# Altium PCB WUT-YJ-4-3-1.PcbDoc (part 7 of 11)
Units mm, origin at the board's own origin, x right, y up, seen from the top; angles counter-clockwise.
Board outline 85 x 56 mm, 4 copper layers (Top Layer, GND_Plane, 3V3_Plane, Bottom Layer); 182 components, 321 nets, 1106 pads, 360 vias.
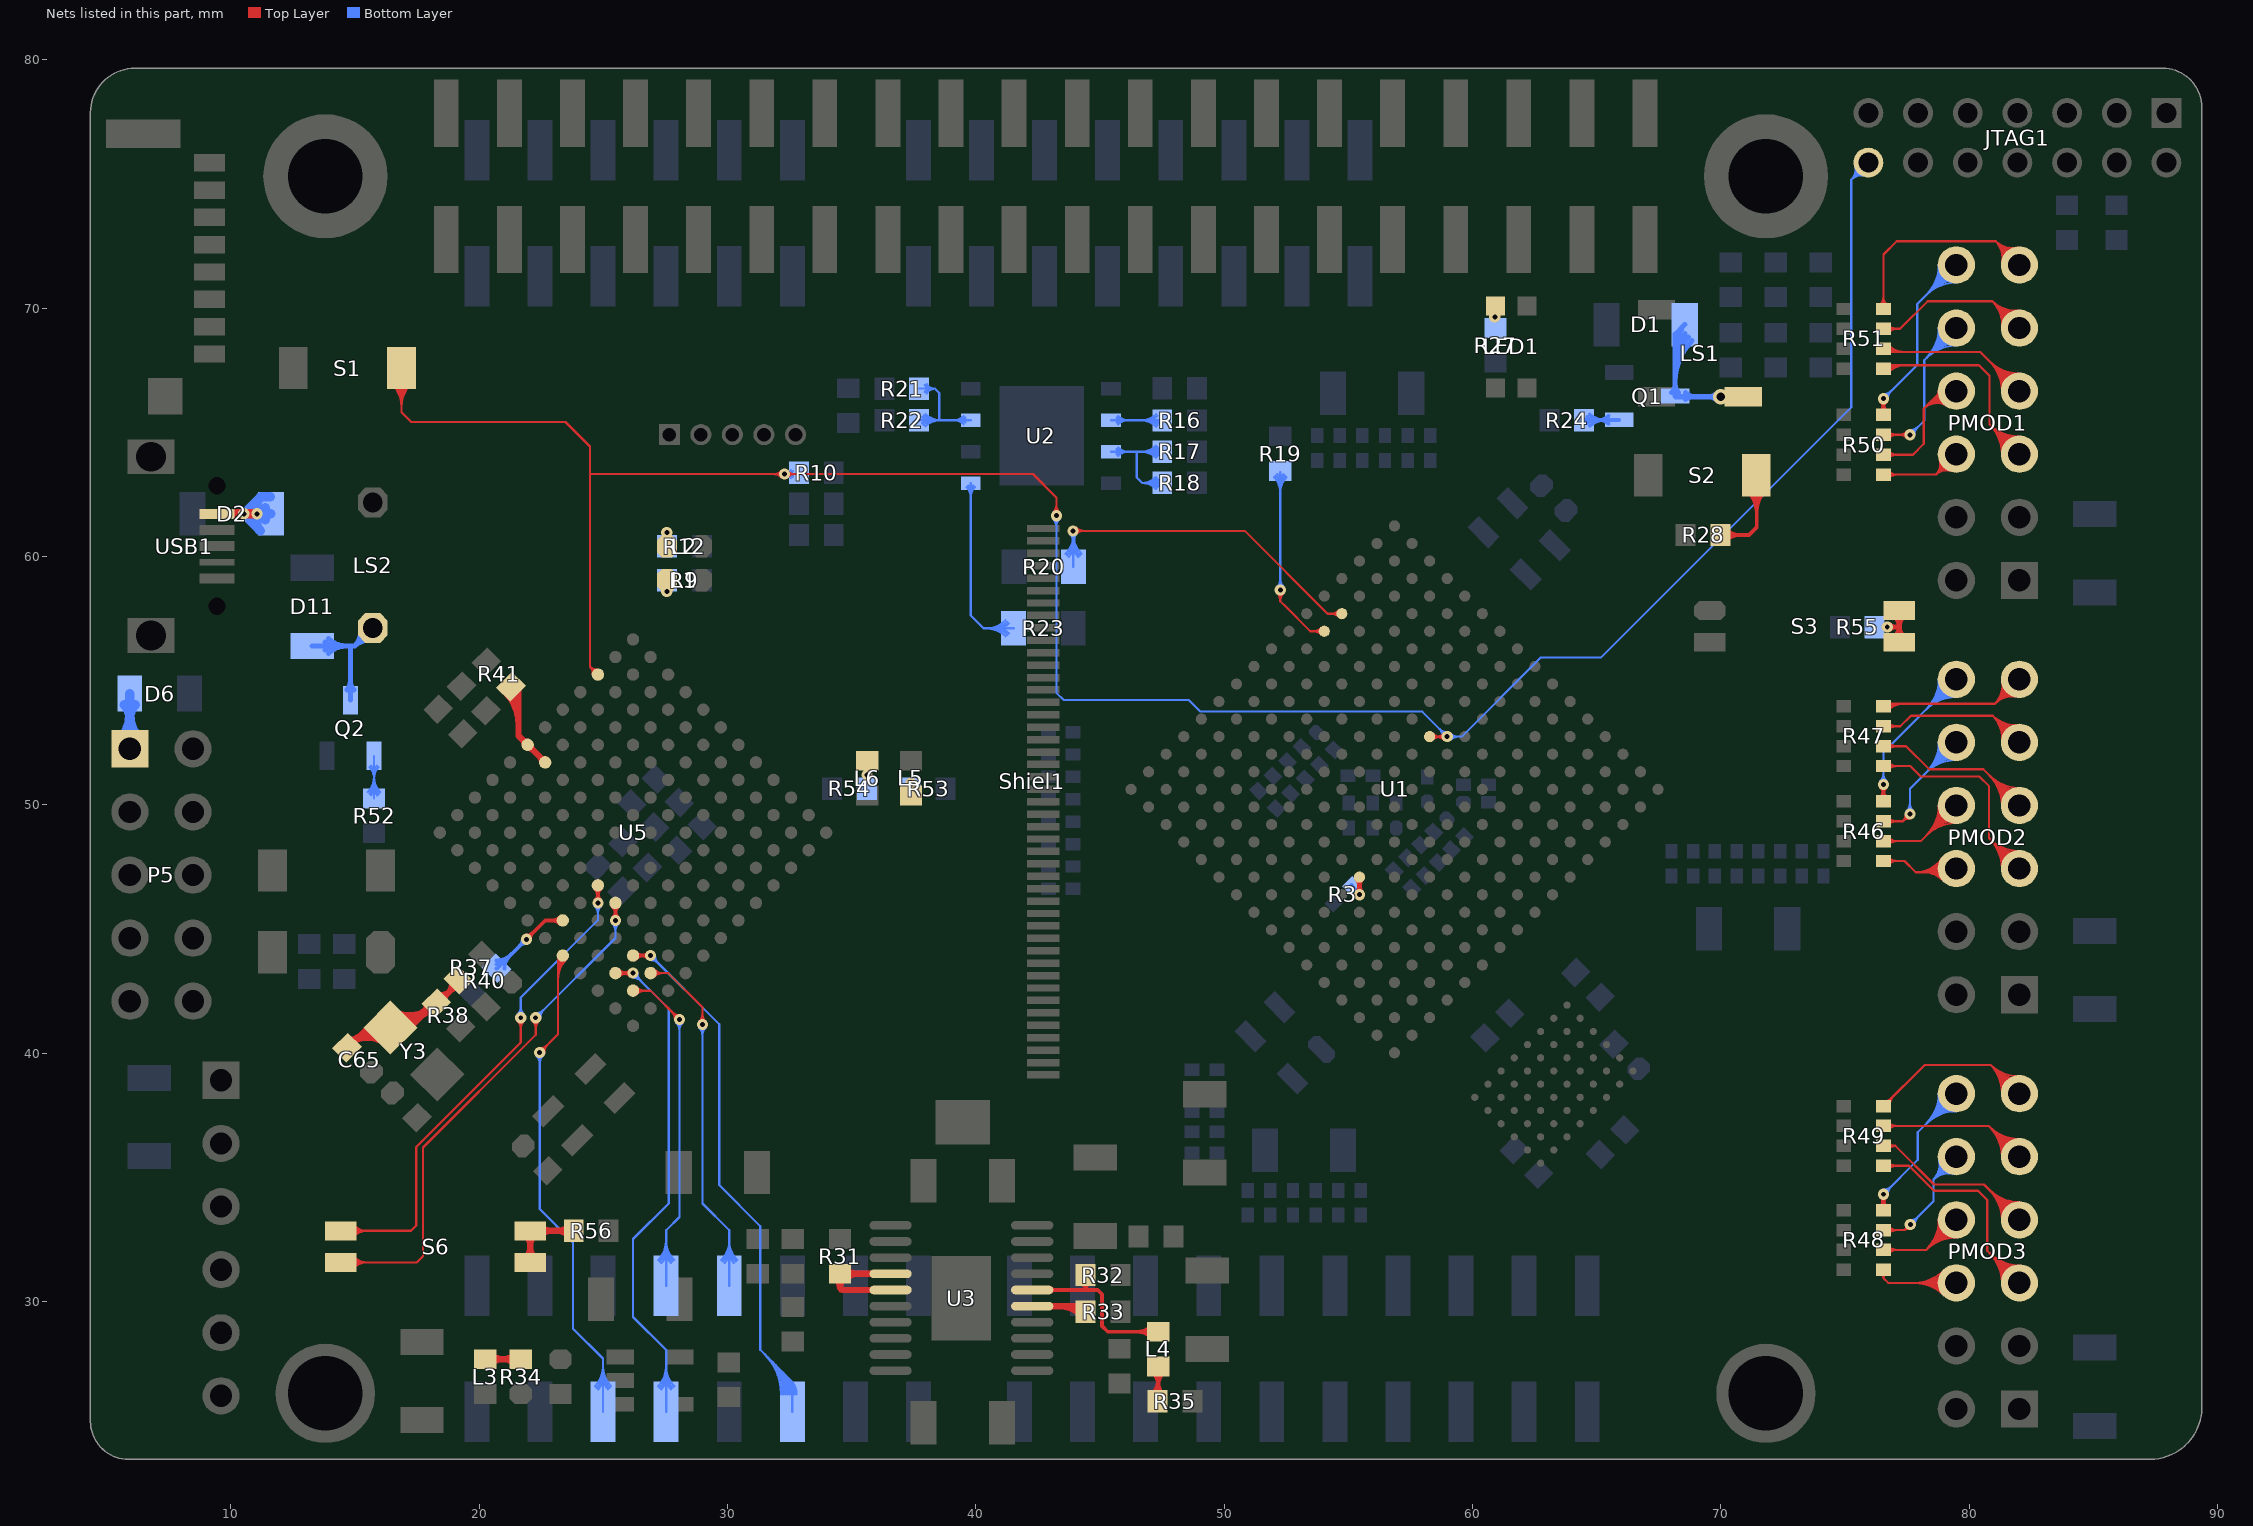
[diagram p9: the nets of this part, all layers, seen from the top]

## Via types
v1: diameter 0.45, hole 0.2, Top Layer to Bottom Layer, tented both sides, 280 vias
v2: diameter 0.61, hole 0.33, Top Layer to Bottom Layer, tented both sides, 40 vias
v3: diameter 0.403, hole 0.2, Top Layer to Bottom Layer, tented both sides, 15 vias
v4: diameter 0.5, hole 0.2, Top Layer to Bottom Layer, tented both sides, 12 vias
v5: diameter 0.864, hole 0.508, Top Layer to Bottom Layer, tented both sides, 11 vias
v6: diameter 0.864, hole 0.356, Top Layer to Bottom Layer, tented both sides, 1 vias
v7: diameter 0.864, hole 0.381, Top Layer to Bottom Layer, tented both sides, 1 vias

## Nets (pads, with @x,y where several pads share a name; then routed paths per layer and width w, separated by ;. In a path a pad name is that pad's centre, name@x,y a point inside that pad or via, vN(x,y) a via of type N, cw(c..) or ccw(c..) an arc to the next point about the centre after c; other vN are vias at no path point) (continued)
NetC65_2: C65.2 R37.1 R38.2 Y3.2 | length 35.1
  Top Layer w0.152: C65.2@14.717,40.44 ccw(c14.717,40.854) 15.009,40.561 ccw(c15.302,40.269) C65.2@14.888,40.269 ; C65.2@14.717,40.592 ccw(c14.717,41.374) 15.27,40.821 ccw(c15.822,40.269) C65.2@15.041,40.269 ; C65.2@14.824,40.376 cw(c15.616,39.584) Y3.2@16.162,40.562 ; C65.2@14.967,40.518 cw(c15.718,39.767) Y3.2@16.236,40.695 ; 15.109,40.661 cw(c15.82,39.95) Y3.2@16.311,40.828 ; 15.252,40.803 cw(c15.922,40.133) Y3.2@16.385,40.961 ; 15.394,40.946 cw(c16.025,40.316) Y3.2@16.459,41.094 ; Y3.2@15.537,41.088 cw(c16.127,40.498) Y3.2@16.534,41.227 ; Y3.2@16.088,40.429 ccw(c15.514,39.401) C65.2@14.682,40.233 15.486,41.038 Y3.2@16.43,41.038 17.29,41.038 R38.2@18.276,42.024 ; Y3.2@16.353,40.836 ccw(c16.668,41.647) Y3.2@17.283,41.032 ; Y3.2@16.409,40.978 ccw(c16.76,41.886) 17.449,41.197 ; Y3.2@16.464,41.12 ccw(c16.853,42.124) 17.614,41.363 ; Y3.2@16.519,41.262 ccw(c16.945,42.362) 17.78,41.528 ; Y3.2@16.574,41.404 ccw(c17.038,42.601) 17.945,41.693 ; Y3.2@16.629,41.546 ccw(c17.13,42.839) R38.2@18.11,41.859 ; Y3.2@16.684,41.688 ccw(c17.222,43.077) R38.2@18.276,42.024 ; 17.512,41.5 ccw(c17.048,42.274) R38.2@17.925,42.064 ; 17.685,41.604 cw(c18.009,41.064) R38.2@18.162,41.675 ; 17.823,41.686 ccw(c17.541,42.156) R38.2@18.074,42.028 ; R38.2@17.916,41.989 cw(c17.135,41.989) 17.688,41.436 cw(c18.24,40.883) R38.2@18.24,41.665 ; R38.2@17.925,42.062 cw(c17.287,42.209) 17.614,41.642 cw(c17.917,41.119) R38.2@18.127,41.685 ; R38.2@18.069,41.989 cw(c17.655,41.989) 17.948,41.696 cw(c18.24,41.403) R38.2@18.24,41.817 ; R38.2@18.304,42.231 ccw(c18.282,42.768) 18.748,42.499 ; R38.2@18.311,42.231 ccw(c18.311,42.95) 18.819,42.441 ; R38.2@18.311,42.383 ccw(c18.311,43.47) R37.1@19.079,42.701 ; R38.2@18.571,42.193 ccw(c17.836,42.929) R37.1@18.876,42.929 ; R38.2@18.624,42.143 cw(c18.856,42.205) 18.648,42.326 ; R38.2@18.635,42.059 cw(c19.111,42.059) 18.774,42.396 ; 18.83,42.452 cw(c19.2,42.082) R37.1@19.2,42.605 ; 18.832,42.454 ccw(c18.356,42.929) R37.1@19.029,42.929 ; R37.1@19.254,42.876 18.402,42.024 R38.2@18.276,42.024
NetD1_1: D1.1 LS1.2 Q1.1 | length 14.6
  Top Layer w0.203: v2@69.99,66.434 v2(69.992,66.436) ; v2@70.136,66.293 cw(c70.483,65.946) 70.483,66.436 cw(c70.483,66.927) v2@70.136,66.58 ; LS1.2@70.304,66.27 ccw(c69.992,66.062) v2(69.992,66.436) ; LS1.2@70.304,66.602 cw(c69.992,66.811) v2(69.992,66.436) ; LS1.2@70.901,66.436 v2(69.992,66.436)
  Bottom Layer w0.203: Q1.1@68.015,66.599 ccw(c67.677,66.938) 68.156,66.938 ccw(c68.635,66.938) Q1.1@68.296,66.599 ; 68.156,67.037 cw(c70.497,67.037) D1.1@68.841,68.693 ; 68.156,67.527 cw(c70.007,67.527) D1.1@68.698,68.836 ; 68.156,68.018 cw(c69.516,68.018) D1.1@68.554,68.98 ; D1.1@68.156,68.508 cw(c69.026,68.508) D1.1@68.41,69.124 ; D1.1@68.542,69.342 68.156,68.956 Q1.1@68.156,66.459 68.178,66.436 v2(69.992,66.436) ; Q1.1@68.571,66.319 cw(c68.855,66.035) 68.855,66.436 ; Q1.1@68.571,66.599 ccw(c68.965,66.993) 68.965,66.436 ; v2@69.849,66.293 ccw(c69.502,65.946) 69.502,66.436 ccw(c69.502,66.927) v2@69.849,66.58
NetD2_1: D2.1 USB1.1 | length 9
  Top Layer w0.381: USB1.1@9.449,61.722 v1(10.528,61.722) v1(11.062,61.722)
  Bottom Layer w0.381: v1@11.092,61.706 ccw(c11.597,61.445) 11.195,61.043 10.528,61.709 v1(10.528,61.722) ; v1@11.093,61.736 cw(c11.637,61.985) D2.1@11.214,62.408 ; D2.1@11.384,61.485 ccw(c10.813,60.914) 10.813,61.722 ccw(c10.813,62.53) D2.1@11.384,61.959 ; D2.1@11.595,62.408 D2.1@11.214,62.408 ; D2.1@11.621,61.722 v1(11.062,61.722) ; v1(10.528,61.722) v1(11.062,61.722) ; v1(10.528,61.722) D2.1@11.214,62.408 ; v1(11.062,61.722) cw(c11.062,61.422) 11.326,61.564 ccw(c11.062,61.422) v1(11.062,61.722) ; v1(11.062,61.722) ccw(c11.062,62.022) 11.326,61.88 cw(c11.062,62.022) v1(11.062,61.722)
NetD6_2: D6.2 P5.1 | length 5.5
  Bottom Layer w0.381: P5.1@5.548,52.656 ccw(c4.608,53.596) 5.937,53.596 ; D6.2@5.719,54.039 cw(c5.19,53.511) 5.937,53.511 cw(c6.685,53.511) D6.2@6.156,54.039 ; 5.937,53.626 ccw(c7.309,53.626) P5.1@6.339,52.656 ; D6.2@5.937,54.483 5.937,52.267 P5.1@5.944,52.261
NetD11_1: D11.1 LS2.2 Q2.1 | length 10.4
  Bottom Layer w0.203: D11.1@13.284,56.4 14.783,56.4 ; D11.1@13.79,56.245 cw(c14.166,55.869) 14.166,56.4 cw(c14.166,56.932) D11.1@13.79,56.556 ; D11.1@13.934,56.101 cw(c14.656,55.378) 14.656,56.4 cw(c14.656,57.423) D11.1@13.934,56.7 ; Q2.1@14.681,54.639 ccw(c14.342,54.978) 14.821,54.978 ccw(c15.3,54.978) Q2.1@14.961,54.639 ; Q2.1@14.821,54.224 14.821,56.362 14.783,56.4 ; LS2.2@15.228,57.065 cw(c14.431,56.968) 14.999,56.401 ; LS2.2@15.43,57.089 cw(c14.958,57.032) 15.294,56.696 cw(c15.63,56.36) LS2.2@15.687,56.832 ; LS2.2@15.663,56.63 ccw(c15.566,55.833) 14.999,56.401 ; LS2.2@15.723,57.125 14.998,56.4 ; 14.783,56.4 14.998,56.4
NetL1_1: L1.1 R9.1
  other v1: 27.559,58.598
NetL2_1: L2.1 R12.1
  other v1: 27.559,60.973
NetL3_2: L3.2 R34.2 | length 3.5
  Top Layer w0.254: L3.2@20.244,27.688 R34.2@21.679,27.688 ; L3.2@20.487,27.494 cw(c20.953,27.028) 20.953,27.688 cw(c20.953,28.347) L3.2@20.487,27.881 ; R34.2@21.436,27.494 ccw(c20.97,27.028) 20.97,27.688 ccw(c20.97,28.347) R34.2@21.436,27.881
NetL4_2: L4.2 R35.2 | length 4.9
  Top Layer w0.152: R35.2@47.09,26.276 ccw(c46.472,26.894) 47.346,26.894 ; L4.2@47.117,27.163 cw(c46.564,26.611) 47.346,26.611 cw(c48.127,26.611) L4.2@47.575,27.163 ; R35.2@47.198,26.168 ccw(c46.84,26.526) 47.346,26.526 ; L4.2@47.224,27.271 cw(c46.932,26.979) 47.346,26.979 cw(c47.759,26.979) L4.2@47.467,27.271 ; R35.2@47.319,25.997 47.346,26.024 L4.2@47.346,27.392 ; 47.346,26.764 ccw(c48.035,26.764) R35.2@47.548,26.276
NetL5_2: L5.2 R53.2
  other v1: 37.389,50.889
NetL6_2: L6.2 R54.2
  other v1: 35.623,51.206
NetLED1_2: LED1.2 R27.1
  other v1: 60.896,69.647
NetPMOD1_5: PMOD1.5 R51.1 | length 19.9
  Top Layer w0.089: R51.1@76.543,67.57 76.676,67.704 80.391,67.704 80.81,67.285 80.81,65.329 PMOD1.5@82.017,64.122 ; R51.1@76.612,67.551 cw(c76.981,67.182) 76.981,67.704 ; R51.1@76.675,67.488 cw(c77.196,66.967) 77.196,67.704 ; R51.1@76.738,67.425 cw(c77.411,66.753) 77.411,67.704 ; PMOD1.5@81.311,64.122 ccw(c79.608,64.122) 80.812,65.327 ccw(c82.017,66.531) PMOD1.5@82.017,64.828 ; PMOD1.5@81.4,64.122 ccw(c79.911,64.122) 80.964,65.175 ccw(c82.017,66.228) PMOD1.5@82.017,64.739 ; PMOD1.5@81.489,64.122 ccw(c80.215,64.122) 81.116,65.023 ccw(c82.017,65.924) PMOD1.5@82.017,64.65 ; PMOD1.5@81.578,64.122 ccw(c80.518,64.122) 81.267,64.871 ccw(c82.017,65.621) PMOD1.5@82.017,64.561 ; PMOD1.5@81.667,64.122 ccw(c80.822,64.122) 81.419,64.72 ccw(c82.017,65.317) PMOD1.5@82.017,64.472
NetPMOD1_6: PMOD1.6 R50.1 | length 7.9
  Top Layer w0.089: R50.1@76.543,63.303 78.658,63.303 ; R50.1@76.675,63.221 cw(c76.874,63.022) 76.874,63.303 cw(c76.874,63.585) R50.1@76.675,63.386 ; R50.1@76.738,63.158 cw(c77.089,62.807) 77.089,63.303 cw(c77.089,63.8) R50.1@76.738,63.449 ; PMOD1.6@78.804,63.908 cw(c78.235,63.726) 78.658,63.303 ; PMOD1.6@78.889,63.935 cw(c78.391,63.776) 78.761,63.407 cw(c79.13,63.037) PMOD1.6@79.289,63.535 ; PMOD1.6@78.974,63.962 cw(c78.548,63.826) 78.864,63.51 cw(c79.18,63.194) PMOD1.6@79.316,63.62 ; PMOD1.6@79.262,63.45 ccw(c79.08,62.881) 78.658,63.303 ; PMOD1.6@79.477,64.122 78.658,63.303
NetPMOD1_7: PMOD1.7 R51.3 | length 17.9
  Top Layer w0.089: R51.3@76.543,68.371 76.676,68.237 80.442,68.237 PMOD1.7@82.017,66.662 ; R51.3@76.612,68.39 ccw(c76.982,68.76) 76.982,68.237 ; R51.3@76.675,68.453 ccw(c77.196,68.974) 77.196,68.237 ; R51.3@76.738,68.516 ccw(c77.411,69.189) 77.411,68.237 ; PMOD1.7@81.311,66.662 ccw(c79.608,66.662) 80.812,67.867 ccw(c82.017,69.071) PMOD1.7@82.017,67.368 ; PMOD1.7@81.4,66.662 ccw(c79.911,66.662) 80.964,67.715 ccw(c82.017,68.768) PMOD1.7@82.017,67.279 ; PMOD1.7@81.489,66.662 ccw(c80.215,66.662) 81.116,67.563 ccw(c82.017,68.464) PMOD1.7@82.017,67.19 ; PMOD1.7@81.578,66.662 ccw(c80.518,66.662) 81.267,67.411 ccw(c82.017,68.161) PMOD1.7@82.017,67.101 ; PMOD1.7@81.667,66.662 ccw(c80.822,66.662) 81.419,67.26 ccw(c82.017,67.857) PMOD1.7@82.017,67.012
NetPMOD1_8: PMOD1.8 R50.3 | length 13.4
  Top Layer w0.089: R50.3@76.543,64.103 77.73,64.103 78.168,64.541 78.168,65.964 ; R50.3@76.675,64.021 cw(c76.874,63.822) 76.874,64.103 cw(c76.874,64.385) R50.3@76.675,64.186 ; R50.3@76.738,63.958 cw(c77.089,63.607) 77.089,64.103 cw(c77.089,64.6) R50.3@76.738,64.249 ; 78.247,66.042 cw(c78.759,65.531) PMOD1.8@79.146,66.142 ; 78.325,66.121 cw(c78.82,65.627) PMOD1.8@79.194,66.217 ; 78.404,66.199 cw(c78.88,65.723) PMOD1.8@79.241,66.292 ; 78.482,66.278 cw(c78.941,65.819) PMOD1.8@79.289,66.367 ; 78.561,66.356 cw(c79.002,65.915) PMOD1.8@79.337,66.442 ; 78.639,66.435 cw(c79.063,66.011) PMOD1.8@79.384,66.517 ; 78.703,66.499 ccw(c78.539,66.662) PMOD1.8@78.771,66.662 ; 78.718,66.513 cw(c79.124,66.107) PMOD1.8@79.432,66.592 ; PMOD1.8@79.099,66.067 ccw(c78.698,65.435) 78.169,65.964 ; PMOD1.8@79.477,66.662 78.867,66.662 78.168,65.964
NetPMOD1_9: PMOD1.9 R51.5 | length 16
  Top Layer w0.089: R51.5@76.543,69.17 77.21,69.17 78.321,70.282 80.937,70.282 ; R51.5@76.675,69.088 cw(c76.874,68.889) 76.874,69.17 cw(c76.874,69.452) R51.5@76.675,69.253 ; R51.5@76.738,69.025 cw(c77.089,68.674) 77.089,69.17 cw(c77.089,69.667) R51.5@76.738,69.316 ; PMOD1.9@81.313,69.259 ccw(c80.019,69.363) 80.937,70.282 ; PMOD1.9@81.402,69.252 ccw(c80.271,69.343) 81.073,70.146 ccw(c81.876,70.948) PMOD1.9@81.967,69.817 ; PMOD1.9@81.491,69.245 ccw(c80.522,69.323) 81.209,70.01 ccw(c81.896,70.697) PMOD1.9@81.974,69.728 ; PMOD1.9@81.579,69.238 ccw(c80.774,69.303) 81.345,69.874 ccw(c81.916,70.445) PMOD1.9@81.981,69.64 ; PMOD1.9@81.668,69.23 ccw(c81.026,69.282) 81.481,69.738 ccw(c81.937,70.193) PMOD1.9@81.988,69.551 ; PMOD1.9@81.96,69.906 cw(c81.855,71.2) 80.937,70.282 ; PMOD1.9@82.017,69.202 80.937,70.282
NetPMOD1_10: PMOD1.10 R50.5 | length 18.7
  Top Layer w0.089: R50.5@76.543,64.903 v1(77.61,64.903) ; R50.5@76.675,64.821 cw(c76.874,64.622) 76.874,64.903 cw(c76.874,65.185) R50.5@76.675,64.986 ; R50.5@76.738,64.758 cw(c77.089,64.407) 77.089,64.903 cw(c77.089,65.4) R50.5@76.738,65.049 ; v1@77.482,64.776 ccw(c77.174,64.467) 77.174,64.903 ccw(c77.174,65.339) v1@77.482,65.031
  Bottom Layer w0.089: v1(77.61,64.903) 78.181,65.475 78.181,67.907 PMOD1.10@79.477,69.202 ; v1@77.61,65.084 ccw(c77.61,65.52) 77.918,65.212 ccw(c78.226,64.903) v1@77.79,64.903 ; PMOD1.10@78.771,69.202 cw(c77.068,69.202) 78.272,67.998 cw(c79.477,66.793) PMOD1.10@79.477,68.497 ; PMOD1.10@78.86,69.202 cw(c77.371,69.202) 78.424,68.15 cw(c79.477,67.097) PMOD1.10@79.477,68.586 ; PMOD1.10@78.949,69.202 cw(c77.675,69.202) 78.576,68.301 cw(c79.477,67.4) PMOD1.10@79.477,68.675 ; PMOD1.10@79.038,69.202 cw(c77.978,69.202) 78.727,68.453 cw(c79.477,67.704) PMOD1.10@79.477,68.763 ; PMOD1.10@79.127,69.202 cw(c78.282,69.202) 78.879,68.605 cw(c79.477,68.008) PMOD1.10@79.477,68.852
NetPMOD1_11: PMOD1.11 R51.7 | length 15.3
  Top Layer w0.089: R51.7@76.397,70.116 ccw(c76.047,70.467) 76.543,70.467 ccw(c77.039,70.467) R51.7@76.688,70.116 ; R51.7@76.46,70.053 ccw(c76.261,70.252) 76.543,70.252 ccw(c76.824,70.252) R51.7@76.625,70.053 ; R51.7@76.543,69.971 76.543,72.161 77.076,72.695 81.064,72.695 ; PMOD1.11@81.322,71.868 ccw(c80.404,72.035) 81.064,72.695 ; PMOD1.11@81.41,71.852 ccw(c80.608,71.998) 81.184,72.575 ccw(c81.761,73.151) PMOD1.11@81.906,72.349 ; PMOD1.11@81.497,71.837 ccw(c80.811,71.961) 81.304,72.455 ccw(c81.798,72.948) PMOD1.11@81.922,72.262 ; PMOD1.11@81.585,71.821 ccw(c81.014,71.924) 81.424,72.335 ccw(c81.835,72.745) PMOD1.11@81.938,72.174 ; PMOD1.11@81.891,72.436 cw(c81.724,73.354) 81.064,72.695 ; PMOD1.11@82.017,71.742 81.064,72.695
NetPMOD1_12: PMOD1.12 R50.7 | length 20.8
  Top Layer w0.089: R50.7@76.397,65.849 ccw(c76.047,66.2) 76.543,66.2 ccw(c77.039,66.2) R50.7@76.688,65.849 ; v1@76.415,66.23 cw(c76.107,65.922) 76.543,65.922 cw(c76.979,65.922) v1@76.67,66.23 ; v1@76.43,66.216 cw(c76.312,66.069) 76.495,66.02 ; v1@76.453,66.201 cw(c76.304,65.944) 76.591,66.021 ; R50.7@76.46,65.786 ccw(c76.261,65.985) 76.543,65.985 ccw(c76.824,65.985) R50.7@76.625,65.786 ; 76.495,66.021 cw(c76.781,65.944) v1@76.633,66.201 ; R50.7@76.543,65.703 v1(76.543,66.357) ; 76.591,66.02 cw(c76.774,66.069) v1@76.656,66.216
  Bottom Layer w0.089: v1(76.543,66.357) 77.902,67.716 77.902,70.168 PMOD1.12@79.477,71.742 ; v1@76.543,66.538 ccw(c76.543,66.974) 76.851,66.666 ccw(c77.159,66.357) v1@76.723,66.357 ; PMOD1.12@78.771,71.742 cw(c77.068,71.742) 78.272,70.538 cw(c79.477,69.333) PMOD1.12@79.477,71.037 ; PMOD1.12@78.86,71.742 cw(c77.371,71.742) 78.424,70.69 cw(c79.477,69.637) PMOD1.12@79.477,71.126 ; PMOD1.12@78.949,71.742 cw(c77.675,71.742) 78.576,70.841 cw(c79.477,69.94) PMOD1.12@79.477,71.215 ; PMOD1.12@79.038,71.742 cw(c77.978,71.742) 78.727,70.993 cw(c79.477,70.244) PMOD1.12@79.477,71.303 ; PMOD1.12@79.127,71.742 cw(c78.282,71.742) 78.879,71.145 cw(c79.477,70.548) PMOD1.12@79.477,71.392
NetPMOD2_5: PMOD2.5 R47.1 | length 19.6
  Top Layer w0.089: R47.1@76.543,51.568 77.616,51.568 78.041,51.143 80.404,51.143 80.797,50.749 80.797,48.66 PMOD2.5@82.017,47.441 ; R47.1@76.675,51.486 cw(c76.874,51.287) 76.874,51.568 cw(c76.874,51.85) R47.1@76.675,51.651 ; R47.1@76.738,51.423 cw(c77.089,51.072) 77.089,51.568 cw(c77.089,52.065) R47.1@76.738,51.714 ; PMOD2.5@81.311,47.441 ccw(c79.608,47.441) 80.812,48.645 ccw(c82.017,49.85) PMOD2.5@82.017,48.146 ; PMOD2.5@81.4,47.441 ccw(c79.911,47.441) 80.964,48.494 ccw(c82.017,49.546) PMOD2.5@82.017,48.057 ; PMOD2.5@81.489,47.441 ccw(c80.215,47.441) 81.116,48.342 ccw(c82.017,49.243) PMOD2.5@82.017,47.969 ; PMOD2.5@81.578,47.441 ccw(c80.518,47.441) 81.267,48.19 ccw(c82.017,48.939) PMOD2.5@82.017,47.88 ; PMOD2.5@81.667,47.441 ccw(c80.822,47.441) 81.419,48.038 ccw(c82.017,48.636) PMOD2.5@82.017,47.791
NetPMOD2_6: PMOD2.6 R46.1 | length 12.5
  Top Layer w0.089: R46.1@76.543,47.746 77.387,47.746 77.838,47.295 ; R46.1@76.675,47.663 cw(c76.874,47.464) 76.874,47.746 cw(c76.874,48.027) R46.1@76.675,47.828 ; R46.1@76.738,47.6 cw(c77.089,47.25) 77.089,47.746 cw(c77.089,48.242) R46.1@76.738,47.891 ; 78.009,47.295 ccw(c78.009,48.471) PMOD2.6@78.972,47.795 ; 78.126,47.295 cw(c78.126,46.09) PMOD2.6@78.978,46.942 ; 78.18,47.295 ccw(c78.18,48.351) PMOD2.6@79.045,47.744 ; 78.34,47.295 cw(c78.34,46.305) PMOD2.6@79.041,47.005 ; 78.351,47.295 ccw(c78.351,48.231) PMOD2.6@79.117,47.693 ; 78.522,47.295 ccw(c78.522,48.111) PMOD2.6@79.19,47.642 ; 78.555,47.295 cw(c78.555,46.519) PMOD2.6@79.103,47.068 ; 78.693,47.295 ccw(c78.693,47.991) PMOD2.6@79.263,47.591 ; PMOD2.6@78.899,47.846 cw(c77.838,48.591) 77.838,47.295 ; PMOD2.6@79.477,47.441 79.331,47.295 77.838,47.295
NetPMOD2_7: PMOD2.7 R47.3 | length 17.7
  Top Layer w0.089: R47.3@76.543,52.369 77.451,52.369 78.384,51.435 80.562,51.435 PMOD2.7@82.017,49.981 ; R47.3@76.675,52.286 cw(c76.874,52.087) 76.874,52.369 cw(c76.874,52.65) R47.3@76.675,52.451 ; R47.3@76.738,52.223 cw(c77.089,51.872) 77.089,52.369 cw(c77.089,52.865) R47.3@76.738,52.514 ; PMOD2.7@81.311,49.981 ccw(c79.608,49.981) 80.812,51.185 ccw(c82.017,52.39) PMOD2.7@82.017,50.686 ; PMOD2.7@81.4,49.981 ccw(c79.911,49.981) 80.964,51.034 ccw(c82.017,52.086) PMOD2.7@82.017,50.597 ; PMOD2.7@81.489,49.981 ccw(c80.215,49.981) 81.116,50.882 ccw(c82.017,51.783) PMOD2.7@82.017,50.509 ; PMOD2.7@81.578,49.981 ccw(c80.518,49.981) 81.267,50.73 ccw(c82.017,51.479) PMOD2.7@82.017,50.42 ; PMOD2.7@81.667,49.981 ccw(c80.822,49.981) 81.419,50.578 ccw(c82.017,51.176) PMOD2.7@82.017,50.331
NetPMOD2_8: PMOD2.8 R46.3 | length 14.8
  Top Layer w0.089: R46.3@76.543,48.546 78.042,48.546 PMOD2.8@79.477,49.981 ; R46.3@76.675,48.463 cw(c76.874,48.264) 76.874,48.546 cw(c76.874,48.827) R46.3@76.675,48.628 ; R46.3@76.738,48.4 cw(c77.089,48.05) 77.089,48.546 cw(c77.089,49.042) R46.3@76.738,48.691 ; PMOD2.8@78.771,49.981 cw(c77.068,49.981) 78.272,48.776 cw(c79.477,47.572) PMOD2.8@79.477,49.275 ; PMOD2.8@78.86,49.981 cw(c77.371,49.981) 78.424,48.928 cw(c79.477,47.875) PMOD2.8@79.477,49.364 ; PMOD2.8@78.949,49.981 cw(c77.675,49.981) 78.576,49.08 cw(c79.477,48.179) PMOD2.8@79.477,49.453 ; PMOD2.8@79.038,49.981 cw(c77.978,49.981) 78.727,49.232 cw(c79.477,48.483) PMOD2.8@79.477,49.542 ; PMOD2.8@79.127,49.981 cw(c78.282,49.981) 78.879,49.383 cw(c79.477,48.786) PMOD2.8@79.477,49.631
NetPMOD2_9: PMOD2.9 R47.5 | length 15.6
  Top Layer w0.089: R47.5@76.543,53.168 77.222,53.168 77.648,53.594 80.943,53.594 ; R47.5@76.675,53.086 cw(c76.874,52.887) 76.874,53.168 cw(c76.874,53.45) R47.5@76.675,53.251 ; R47.5@76.738,53.023 cw(c77.089,52.672) 77.089,53.168 cw(c77.089,53.665) R47.5@76.738,53.314 ; PMOD2.9@81.314,52.581 ccw(c80.039,52.689) 80.944,53.594 ; PMOD2.9@81.402,52.573 ccw(c80.288,52.668) 81.079,53.459 ccw(c81.869,54.249) PMOD2.9@81.964,53.135 ; PMOD2.9@81.491,52.566 ccw(c80.537,52.647) 81.214,53.324 ccw(c81.891,54) PMOD2.9@81.972,53.047 ; PMOD2.9@81.579,52.558 ccw(c80.786,52.626) 81.349,53.188 ccw(c81.912,53.751) PMOD2.9@81.979,52.958 ; PMOD2.9@81.668,52.551 ccw(c81.036,52.604) 81.484,53.053 ccw(c81.933,53.502) PMOD2.9@81.987,52.87 ; PMOD2.9@81.957,53.224 cw(c81.848,54.499) 80.944,53.594 ; PMOD2.9@82.017,52.521 80.943,53.594
NetPMOD2_10: PMOD2.10 R46.5 | length 17.4
  Top Layer w0.089: R46.5@76.543,49.346 77.324,49.346 ; R46.5@76.675,49.263 cw(c76.874,49.064) 76.874,49.346 cw(c76.874,49.627) R46.5@76.675,49.428 ; R46.5@76.738,49.2 cw(c77.089,48.85) 77.089,49.346 cw(c77.089,49.842) R46.5@76.738,49.491 ; v1@77.429,49.622 cw(c77.068,49.602) 77.324,49.346 ; v1@77.6,49.451 ccw(c77.58,49.09) 77.324,49.346 ; v1(77.61,49.632) 77.324,49.346
  Bottom Layer w0.089: v1@77.482,49.759 ccw(c77.174,50.067) 77.61,50.067 ccw(c78.046,50.067) v1@77.737,49.759 ; v1(77.61,49.632) 77.61,50.654 PMOD2.10@79.477,52.521 ; PMOD2.10@78.771,52.521 cw(c77.068,52.521) 78.272,51.316 cw(c79.477,50.112) PMOD2.10@79.477,51.815 ; PMOD2.10@78.86,52.521 cw(c77.371,52.521) 78.424,51.468 cw(c79.477,50.415) PMOD2.10@79.477,51.904 ; PMOD2.10@78.949,52.521 cw(c77.675,52.521) 78.576,51.62 cw(c79.477,50.719) PMOD2.10@79.477,51.993 ; PMOD2.10@79.038,52.521 cw(c77.978,52.521) 78.727,51.772 cw(c79.477,51.023) PMOD2.10@79.477,52.082 ; PMOD2.10@79.127,52.521 cw(c78.282,52.521) 78.879,51.923 cw(c79.477,51.326) PMOD2.10@79.477,52.171
NetPMOD2_11: PMOD2.11 R47.7 | length 13.6
  Top Layer w0.089: R47.7@76.612,53.949 cw(c76.921,53.641) 76.921,54.077 ; R47.7@76.675,53.886 cw(c77.135,53.426) 77.135,54.077 ; R47.7@76.714,54.077 81.032,54.077 ; R47.7@76.738,53.823 cw(c77.35,53.211) 77.35,54.077 ; R47.7@76.738,54.114 ccw(c76.828,54.204) R47.7@76.828,54.077 ; PMOD2.11@81.319,54.953 cw(c80.311,54.798) 81.032,54.077 ; PMOD2.11@81.407,54.967 cw(c80.526,54.831) 81.156,54.201 cw(c81.787,53.57) PMOD2.11@81.923,54.451 ; PMOD2.11@81.495,54.98 cw(c80.741,54.864) 81.28,54.325 cw(c81.82,53.785) PMOD2.11@81.936,54.539 ; PMOD2.11@81.583,54.994 cw(c80.956,54.897) 81.404,54.449 cw(c81.853,54) PMOD2.11@81.95,54.627 ; PMOD2.11@81.909,54.364 ccw(c81.754,53.355) 81.032,54.077 ; PMOD2.11@82.017,55.061 81.032,54.077
NetPMOD2_12: PMOD2.12 R46.7 | length 19.6
  Top Layer w0.089: R46.7@76.397,50.291 ccw(c76.047,50.642) 76.543,50.642 ccw(c77.039,50.642) R46.7@76.688,50.291 ; v1@76.415,50.698 cw(c76.107,50.389) 76.543,50.389 cw(c76.979,50.389) v1@76.67,50.698 ; v1@76.429,50.685 cw(c76.3,50.526) 76.498,50.473 ; v1@76.453,50.669 cw(c76.316,50.432) 76.58,50.503 ; R46.7@76.46,50.228 ccw(c76.261,50.427) 76.543,50.427 ccw(c76.824,50.427) R46.7@76.625,50.228 ; 76.505,50.503 cw(c76.77,50.432) v1@76.633,50.669 ; R46.7@76.543,50.146 v1(76.543,50.825) ; 76.588,50.473 cw(c76.786,50.526) v1@76.657,50.685
  Bottom Layer w0.089: v1@76.415,50.953 ccw(c76.107,51.261) 76.543,51.261 ccw(c76.979,51.261) v1@76.67,50.953 ; v1(76.543,50.825) 76.543,52.127 PMOD2.12@79.477,55.061 ; PMOD2.12@78.771,55.061 cw(c77.068,55.061) 78.272,53.856 cw(c79.477,52.652) PMOD2.12@79.477,54.355 ; PMOD2.12@78.86,55.061 cw(c77.371,55.061) 78.424,54.008 cw(c79.477,52.955) PMOD2.12@79.477,54.444 ; PMOD2.12@78.949,55.061 cw(c77.675,55.061) 78.576,54.16 cw(c79.477,53.259) PMOD2.12@79.477,54.533 ; PMOD2.12@79.038,55.061 cw(c77.978,55.061) 78.727,54.312 cw(c79.477,53.563) PMOD2.12@79.477,54.622 ; PMOD2.12@79.127,55.061 cw(c78.282,55.061) 78.879,54.463 cw(c79.477,53.866) PMOD2.12@79.477,54.711
NetPMOD3_5: PMOD3.5 R49.1 | length 19.9
  Top Layer w0.089: R49.1@76.543,35.478 77.568,35.478 78.577,34.468 80.353,34.468 80.721,34.099 80.721,32.055 PMOD3.5@82.017,30.759 ; R49.1@76.675,35.395 cw(c76.874,35.196) 76.874,35.478 cw(c76.874,35.759) R49.1@76.675,35.56 ; R49.1@76.738,35.332 cw(c77.089,34.981) 77.089,35.478 cw(c77.089,35.974) R49.1@76.738,35.623 ; PMOD3.5@81.311,30.759 ccw(c79.608,30.759) 80.812,31.964 ccw(c82.017,33.168) PMOD3.5@82.017,31.465 ; PMOD3.5@81.4,30.759 ccw(c79.911,30.759) 80.964,31.812 ccw(c82.017,32.865) PMOD3.5@82.017,31.376 ; PMOD3.5@81.489,30.759 ccw(c80.215,30.759) 81.116,31.66 ccw(c82.017,32.561) PMOD3.5@82.017,31.287 ; PMOD3.5@81.578,30.759 ccw(c80.518,30.759) 81.267,31.509 ccw(c82.017,32.258) PMOD3.5@82.017,31.198 ; PMOD3.5@81.667,30.759 ccw(c80.822,30.759) 81.419,31.357 ccw(c82.017,31.954) PMOD3.5@82.017,31.109
NetPMOD3_6: PMOD3.6 R48.1 | length 13.7
  Top Layer w0.089: R48.1@76.449,31.104 cw(c76.37,30.95) 76.543,30.95 ; R48.1@76.543,31.287 76.543,30.95 ; R48.1@76.637,31.104 ccw(c76.716,30.95) 76.543,30.95 ; PMOD3.6@78.978,30.261 ccw(c77.773,29.056) 77.773,30.759 ccw(c77.773,32.463) PMOD3.6@78.978,31.258 ; PMOD3.6@79.041,30.323 ccw(c77.988,29.271) 77.988,30.759 ccw(c77.988,32.248) PMOD3.6@79.041,31.195 ; PMOD3.6@79.103,30.386 ccw(c78.203,29.485) 78.203,30.759 ccw(c78.203,32.033) PMOD3.6@79.103,31.133 ; PMOD3.6@79.166,30.449 ccw(c78.417,29.7) 78.417,30.759 ccw(c78.417,31.819) PMOD3.6@79.166,31.07 ; PMOD3.6@79.229,30.512 ccw(c78.632,29.915) 78.632,30.759 ccw(c78.632,31.604) PMOD3.6@79.229,31.007 ; PMOD3.6@79.477,30.759 76.733,30.759 76.543,30.95
NetPMOD3_7: PMOD3.7 R49.3 | length 17.3
  Top Layer w0.089: R49.3@76.543,36.278 77.019,36.278 ; R49.3@76.754,36.15 cw(c77.019,35.938) 77.019,36.278 ; R49.3@76.754,36.406 ccw(c77.019,36.617) 77.019,36.278 ; PMOD3.7@81.311,33.299 ccw(c79.608,33.299) 80.812,34.504 ccw(c82.017,35.708) PMOD3.7@82.017,34.005 ; PMOD3.7@81.4,33.299 ccw(c79.911,33.299) 80.964,34.352 ccw(c82.017,35.405) PMOD3.7@82.017,33.916 ; PMOD3.7@81.489,33.299 ccw(c80.215,33.299) 81.116,34.2 ccw(c82.017,35.101) PMOD3.7@82.017,33.827 ; PMOD3.7@81.578,33.299 ccw(c80.518,33.299) 81.267,34.049 ccw(c82.017,34.798) PMOD3.7@82.017,33.738 ; PMOD3.7@81.667,33.299 ccw(c80.822,33.299) 81.419,33.897 ccw(c82.017,34.494) PMOD3.7@82.017,33.649 ; PMOD3.7@82.017,33.299 80.594,34.722 78.575,34.722 77.019,36.278
NetPMOD3_8: PMOD3.8 R48.3 | length 14.7
  Top Layer w0.089: R48.3@76.543,32.087 78.264,32.087 PMOD3.8@79.477,33.299 ; R48.3@76.675,32.004 cw(c76.874,31.805) 76.874,32.087 cw(c76.874,32.368) R48.3@76.675,32.169 ; R48.3@76.738,31.941 cw(c77.089,31.59) 77.089,32.087 cw(c77.089,32.583) R48.3@76.738,32.232 ; PMOD3.8@78.771,33.299 cw(c77.068,33.299) 78.272,32.095 cw(c79.477,30.891) PMOD3.8@79.477,32.594 ; PMOD3.8@78.86,33.299 cw(c77.371,33.299) 78.424,32.247 cw(c79.477,31.194) PMOD3.8@79.477,32.683 ; PMOD3.8@78.949,33.299 cw(c77.675,33.299) 78.576,32.398 cw(c79.477,31.498) PMOD3.8@79.477,32.772 ; PMOD3.8@79.038,33.299 cw(c77.978,33.299) 78.727,32.55 cw(c79.477,31.801) PMOD3.8@79.477,32.861 ; PMOD3.8@79.127,33.299 cw(c78.282,33.299) 78.879,32.702 cw(c79.477,32.105) PMOD3.8@79.477,32.949
NetPMOD3_9: PMOD3.9 R49.5 | length 17.2
  Top Layer w0.089: R49.5@76.543,37.078 80.778,37.078 PMOD3.9@82.017,35.839 ; R49.5@76.675,36.995 cw(c76.874,36.796) 76.874,37.078 cw(c76.874,37.359) R49.5@76.675,37.16 ; R49.5@76.738,36.932 cw(c77.089,36.581) 77.089,37.078 cw(c77.089,37.574) R49.5@76.738,37.223 ; PMOD3.9@81.311,35.839 ccw(c79.608,35.839) 80.812,37.044 ccw(c82.017,38.248) PMOD3.9@82.017,36.545 ; PMOD3.9@81.4,35.839 ccw(c79.911,35.839) 80.964,36.892 ccw(c82.017,37.945) PMOD3.9@82.017,36.456 ; PMOD3.9@81.489,35.839 ccw(c80.215,35.839) 81.116,36.74 ccw(c82.017,37.641) PMOD3.9@82.017,36.367 ; PMOD3.9@81.578,35.839 ccw(c80.518,35.839) 81.267,36.589 ccw(c82.017,37.338) PMOD3.9@82.017,36.278 ; PMOD3.9@81.667,35.839 ccw(c80.822,35.839) 81.419,36.437 ccw(c82.017,37.034) PMOD3.9@82.017,36.189
NetPMOD3_10: PMOD3.10 R48.5 | length 12.4
  Top Layer w0.089: R48.5@76.543,32.887 77.4,32.887 ; R48.5@76.675,32.804 cw(c76.874,32.605) 76.874,32.887 cw(c76.874,33.168) R48.5@76.675,32.969 ; R48.5@76.738,32.741 cw(c77.089,32.39) 77.089,32.887 cw(c77.089,33.383) R48.5@76.738,33.032 ; v1@77.448,33.063 cw(c77.27,33.016) 77.4,32.887 ; v1@77.576,32.934 ccw(c77.53,32.757) 77.4,32.887 ; v1(77.622,33.109) 77.4,32.887
  Bottom Layer w0.089: v1(77.622,33.109) 78.556,34.042 78.556,34.919 ; v1@77.622,33.289 ccw(c77.622,33.725) 77.931,33.417 ccw(c78.239,33.109) v1@77.803,33.109 ; PMOD3.10@78.786,35.694 cw(c77.956,35.519) 78.556,34.919 ; PMOD3.10@78.873,35.712 cw(c78.147,35.559) 78.672,35.035 cw(c79.196,34.51) PMOD3.10@79.349,35.236 ; PMOD3.10@78.96,35.731 cw(c78.339,35.6) 78.788,35.151 cw(c79.237,34.702) PMOD3.10@79.368,35.323 ; PMOD3.10@79.047,35.749 cw(c78.531,35.64) 78.904,35.267 cw(c79.277,34.893) PMOD3.10@79.386,35.41 ; PMOD3.10@79.331,35.149 ccw(c79.156,34.319) 78.556,34.919 ; PMOD3.10@79.477,35.839 78.556,34.919
NetPMOD3_11: PMOD3.11 R49.7 | length 17.1
  Top Layer w0.089: R49.7@76.543,37.878 78.2,39.535 80.861,39.535 ; R49.7@76.593,38.083 ccw(c76.593,38.459) 76.858,38.193 ; R49.7@76.709,37.878 cw(c77.112,37.878) 76.827,38.162 ; R49.7@76.798,37.878 cw(c77.415,37.878) 76.979,38.314 ; PMOD3.11@81.311,38.4 ccw(c79.772,38.446) 80.861,39.535 ; PMOD3.11@81.4,38.398 ccw(c80.055,38.438) 81.007,39.389 ccw(c81.958,40.341) PMOD3.11@81.998,38.996 ; PMOD3.11@81.489,38.395 ccw(c80.338,38.429) 81.152,39.244 ccw(c81.967,40.058) PMOD3.11@82.001,38.907 ; PMOD3.11@81.578,38.392 ccw(c80.62,38.421) 81.298,39.098 ccw(c81.975,39.776) PMOD3.11@82.004,38.818 ; PMOD3.11@81.667,38.39 ccw(c80.903,38.412) 81.443,38.953 ccw(c81.984,39.493) PMOD3.11@82.006,38.729 ; PMOD3.11@81.996,39.085 cw(c81.95,40.624) 80.861,39.535 ; PMOD3.11@82.017,38.379 80.861,39.535
NetPMOD3_12: PMOD3.12 R48.7 | length 19.4
  Top Layer w0.089: R48.7@76.397,33.832 ccw(c76.047,34.183) 76.543,34.183 ccw(c77.039,34.183) R48.7@76.688,33.832 ; v1@76.415,34.2 cw(c76.107,33.892) 76.543,33.892 cw(c76.979,33.892) v1@76.67,34.2 ; v1@76.431,34.186 cw(c76.318,34.044) 76.493,33.998 cw(c76.76,33.926) v1@76.629,34.169 ; v1@76.457,34.169 cw(c76.325,33.926) 76.592,33.998 cw(c76.767,34.044) v1@76.655,34.186 ; R48.7@76.46,33.769 ccw(c76.261,33.968) 76.543,33.968 ccw(c76.824,33.968) R48.7@76.625,33.769 ; R48.7@76.543,33.687 v1(76.543,34.328)
  Bottom Layer w0.089: v1(76.543,34.328) 77.927,35.712 77.927,36.83 PMOD3.12@79.477,38.379 ; v1@76.543,34.509 ccw(c76.543,34.944) 76.851,34.636 ccw(c77.159,34.328) v1@76.723,34.328 ; PMOD3.12@78.771,38.379 cw(c77.068,38.379) 78.272,37.175 cw(c79.477,35.971) PMOD3.12@79.477,37.674 ; PMOD3.12@78.86,38.379 cw(c77.371,38.379) 78.424,37.327 cw(c79.477,36.274) PMOD3.12@79.477,37.763 ; PMOD3.12@78.949,38.379 cw(c77.675,38.379) 78.576,37.478 cw(c79.477,36.578) PMOD3.12@79.477,37.852 ; PMOD3.12@79.038,38.379 cw(c77.978,38.379) 78.727,37.63 cw(c79.477,36.881) PMOD3.12@79.477,37.941 ; PMOD3.12@79.127,38.379 cw(c78.282,38.379) 78.879,37.782 cw(c79.477,37.185) PMOD3.12@79.477,38.029
NetQ1_2: Q1.3 R24.1 | length 4.1
  Bottom Layer w0.152: R24.1@64.492,65.496 Q1.3@65.906,65.496 ; R24.1@64.613,65.373 cw(c64.912,65.074) 64.912,65.496 ; R24.1@64.613,65.615 ccw(c64.9,65.902) 64.9,65.496 ; R24.1@64.721,65.265 cw(c65.28,64.706) 65.28,65.496 ; R24.1@64.721,65.723 ccw(c65.268,66.27) 65.268,65.496 ; 65.06,65.496 ccw(c65.06,66.08) Q1.3@65.472,65.667 ; 65.121,65.496 cw(c65.121,64.999) Q1.3@65.472,65.351
NetQ2_2: Q2.3 R52.1 | length 6.3
  Bottom Layer w0.089: R52.1@15.522,50.52 ccw(c14.915,51.126) 15.773,51.126 ccw(c16.632,51.126) R52.1@16.025,50.52 ; R52.1@15.585,50.457 ccw(c15.13,50.912) 15.773,50.912 ccw(c16.417,50.912) R52.1@15.962,50.457 ; Q2.3@15.59,51.518 cw(c15.148,51.076) 15.773,51.076 ; R52.1@15.648,50.394 ccw(c15.344,50.697) 15.773,50.697 ccw(c16.203,50.697) R52.1@15.899,50.394 ; Q2.3@15.653,51.581 cw(c15.363,51.29) 15.773,51.29 ; R52.1@15.773,50.268 Q2.3@15.773,51.974 ; 15.773,51.088 cw(c16.382,51.088) Q2.3@15.952,51.518 ; 15.773,51.302 cw(c16.167,51.302) Q2.3@15.889,51.581
NetR3_2: R3.2 U1.E7 | length 2.6
  Top Layer w0.203: v1@55.357,46.475 ccw(c55.146,46.686) 55.444,46.686 ccw(c55.742,46.686) v1@55.531,46.475 ; U1.E7@55.357,47.008 cw(c55.146,46.797) 55.444,46.797 cw(c55.742,46.797) U1.E7@55.531,47.008 ; v1(55.444,46.388) U1.E7@55.444,47.095
  Bottom Layer w0.203: R3.2@55.129,46.759 55.129,46.703 v1(55.444,46.388) ; v1@55.321,46.388 ccw(c55.023,46.388) 55.233,46.598 ccw(c55.444,46.809) v1@55.444,46.511
NetR16_1: R16.1 U2.2 | length 6.2
  Bottom Layer w0.089: U2.2@45.447,65.494 R16.1@47.496,65.494 ; U2.2@45.672,65.394 cw(c45.914,65.152) 45.914,65.494 cw(c45.914,65.836) U2.2@45.672,65.594 ; U2.2@45.735,65.331 cw(c46.128,64.937) 46.128,65.494 cw(c46.128,66.05) U2.2@45.735,65.657 ; 46.62,65.494 cw(c46.62,64.592) R16.1@47.258,65.23 ; 46.681,65.494 ccw(c46.681,66.309) R16.1@47.258,65.733 ; 46.835,65.494 cw(c46.835,64.807) R16.1@47.321,65.293 ; 46.896,65.494 ccw(c46.896,66.094) R16.1@47.321,65.67 ; 47.049,65.494 cw(c47.049,65.021) R16.1@47.384,65.356
NetR17_1: R17.1 R18.2 U2.3 | length 11.4
  Bottom Layer w0.089: U2.3@45.447,64.224 46.478,64.224 ; U2.3@45.672,64.124 cw(c45.914,63.882) 45.914,64.224 cw(c45.914,64.566) U2.3@45.672,64.324 ; U2.3@45.735,64.061 cw(c46.128,63.667) 46.128,64.224 cw(c46.128,64.78) U2.3@45.735,64.387 ; R18.2@47.248,62.726 ccw(c46.698,62.219) 46.698,62.967 ; R18.2@47.248,63.208 cw(c46.698,63.714) 46.698,62.967 ; R17.1@47.258,63.972 ccw(c46.651,63.366) 46.651,64.224 ccw(c46.651,65.082) R17.1@47.258,64.475 ; R18.2@47.313,62.786 ccw(c46.901,62.406) 46.901,62.967 ccw(c46.901,63.527) R18.2@47.313,63.147 ; R17.1@47.321,64.035 ccw(c46.865,63.58) 46.865,64.224 ccw(c46.865,64.868) R17.1@47.321,64.412 ; R18.2@47.378,62.846 ccw(c47.104,62.593) 47.104,62.967 ccw(c47.104,63.34) R18.2@47.378,63.087 ; R17.1@47.384,64.098 ccw(c47.08,63.795) 47.08,64.224 ccw(c47.08,64.653) R17.1@47.384,64.35 ; R18.2@47.509,62.967 46.698,62.967 ; R17.1@47.509,64.224 46.478,64.224 ; 46.478,64.224 46.478,63.187 46.698,62.967
NetR19_2: R19.2 U1.L15 | length 12.6
  Top Layer w0.089: v1@52.133,58.534 cw(c51.825,58.225) 52.261,58.225 cw(c52.696,58.225) v1@52.388,58.534 ; v1(52.261,58.661) 52.261,58.204 52.474,57.991 52.474,57.989 53.468,56.994 U1.L15@54.03,56.994 ; U1.L15@53.902,56.867 ccw(c53.594,56.558) 53.594,56.994 ccw(c53.594,57.43) U1.L15@53.902,57.122
  Bottom Layer w0.089: R19.2@52.009,63.196 cw(c51.402,62.589) 52.261,62.589 cw(c53.119,62.589) R19.2@52.512,63.196 ; R19.2@52.072,63.259 cw(c51.617,62.804) 52.261,62.804 cw(c52.904,62.804) R19.2@52.449,63.259 ; v1@52.133,58.789 ccw(c51.825,59.097) 52.261,59.097 ccw(c52.696,59.097) v1@52.388,58.789 ; R19.2@52.135,63.322 cw(c51.831,63.019) 52.261,63.019 cw(c52.69,63.019) R19.2@52.386,63.322 ; v1(52.261,58.661) R19.2@52.261,63.397
NetR20_2: R20.2 U1.M15 | length 21.6
  Top Layer w0.089: v1(43.917,61.036) 50.823,61.036 54.158,57.701 U1.M15@54.737,57.701 ; v1@44.044,60.909 cw(c44.352,60.6) 44.352,61.036 cw(c44.352,61.472) v1@44.044,61.164 ; U1.M15@54.609,57.574 ccw(c54.301,57.266) 54.301,57.701 ccw(c54.301,58.137) U1.M15@54.609,57.829
  Bottom Layer w0.089: R20.2@43.613,60.111 ccw(c42.866,60.858) v1@43.923,60.858 ; R20.2@43.676,60.048 ccw(c43.081,60.643) 43.923,60.643 ; R20.2@43.739,59.985 ccw(c43.296,60.428) 43.923,60.428 ; v1@43.789,60.909 cw(c43.466,60.585) 43.923,60.585 ; v1@43.8,60.898 cw(c43.626,60.693) 43.892,60.653 ; v1@43.812,60.889 cw(c43.584,60.571) 43.97,60.635 ; v1@43.852,60.971 cw(c43.68,60.8) 43.923,60.8 ; v1@43.857,60.966 cw(c43.747,60.836) 43.916,60.811 ; 43.896,60.678 cw(c44.217,60.63) v1@44.024,60.891 ; R20.2@43.923,59.588 v1@43.923,61.036 ; 43.923,60.49 ccw(c44.637,60.49) R20.2@44.132,59.985 ; 43.923,60.615 cw(c44.338,60.615) v1@44.044,60.909 ; 43.923,60.704 ccw(c44.851,60.704) R20.2@44.195,60.048 ; v1@43.923,60.919 ccw(c45.066,60.919) R20.2@44.258,60.111 ; 43.944,60.792 cw(c44.188,60.833) v1@43.99,60.981 ; 43.978,60.587 cw(c44.418,60.66) v1@44.061,60.928
NetR21_2: R21.2 R22.2 U2.7 | length 9.9
  Bottom Layer w0.089: R22.2@37.719,65.494 U2.7@39.797,65.494 ; R21.2@37.719,66.764 38.354,66.764 ; R22.2@37.845,65.368 cw(c38.148,65.065) 38.148,65.494 cw(c38.148,65.923) R22.2@37.845,65.62 ; R22.2@37.908,65.305 cw(c38.363,64.85) 38.363,65.494 cw(c38.363,66.138) R22.2@37.908,65.682 ; R21.2@37.946,66.625 cw(c38.195,66.472) 38.195,66.764 cw(c38.195,67.056) R21.2@37.946,66.903 ; R22.2@37.97,65.242 cw(c38.577,64.636) 38.577,65.494 cw(c38.577,66.352) R22.2@37.97,65.745 ; R21.2@38.022,66.578 cw(c38.354,66.375) 38.354,66.764 ; R21.2@38.022,66.95 ccw(c38.354,67.153) 38.354,66.764 ; 38.532,65.494 38.532,66.586 38.354,66.764 ; U2.7@39.509,65.331 ccw(c39.115,64.937) 39.115,65.494 ccw(c39.115,66.05) U2.7@39.509,65.657 ; U2.7@39.571,65.394 ccw(c39.33,65.152) 39.33,65.494 ccw(c39.33,65.836) U2.7@39.571,65.594
NetR23_2: R23.2 U2.5 | length 12.9
  Bottom Layer w0.089: U2.5@39.634,62.791 cw(c39.24,62.397) 39.797,62.397 cw(c40.353,62.397) U2.5@39.96,62.791 ; U2.5@39.696,62.854 cw(c39.455,62.612) 39.797,62.612 cw(c40.139,62.612) U2.5@39.897,62.854 ; U2.5@39.797,62.954 39.797,57.625 40.31,57.112 R23.2@41.535,57.112 ; R23.2@41.201,56.79 ccw(c40.423,56.012) 40.423,57.112 ccw(c40.423,58.212) R23.2@41.201,57.434 ; R23.2@41.264,56.853 ccw(c40.638,56.227) 40.638,57.112 ccw(c40.638,57.997) R23.2@41.264,57.371 ; R23.2@41.326,56.916 ccw(c40.852,56.441) 40.852,57.112 ccw(c40.852,57.782) R23.2@41.326,57.308
NetR28_2: R28.2 S2.2 | length 8.8
  Top Layer w0.152: R28.2@69.979,60.871 71.133,60.871 71.438,61.176 71.438,63.259 S2.2@71.425,63.271 ; R28.2@70.1,60.75 cw(c70.392,60.457) 70.392,60.871 cw(c70.392,61.285) R28.2@70.1,60.992 ; R28.2@70.207,60.642 cw(c70.76,60.089) 70.76,60.871 cw(c70.76,61.653) R28.2@70.207,61.1 ; S2.2@71.072,62.644 cw(c70.19,61.762) 71.438,61.762 ; S2.2@71.18,62.751 cw(c70.558,62.129) 71.438,62.129 ; 71.438,61.823 cw(c72.598,61.823) S2.2@71.778,62.644 ; 71.438,62.191 cw(c72.23,62.191) S2.2@71.67,62.751
NetR31_1: R31.1 U3.4 U3.5 | length 6.5
  Top Layer w0.254: R31.1@34.36,30.913 cw(c34.073,30.556) 34.531,30.556 ; R31.1@34.702,30.913 ccw(c34.99,30.556) 34.531,30.556 ; R31.1@34.774,30.933 cw(c35.237,30.471) 35.237,31.125 ; R31.1@34.774,31.319 ccw(c35.244,31.789) 35.244,31.125 ; U3.5@36.571,30.475 34.613,30.475 34.531,30.556 ; U3.4@36.571,31.125 34.533,31.125 R31.1@34.531,31.126 34.531,30.556
NetR33_2: R33.2 U3.15 | length 3.7
  Top Layer w0.254: U3.15@42.271,29.825 44.202,29.825 R33.2@44.423,29.604 ; 43.351,29.825 cw(c43.351,28.582) R33.2@44.23,29.461 ; 43.964,29.825 cw(c43.964,29.195) R33.2@44.41,29.64
NetR41_2: R41.2 U5.G1 U5.G2 | length 8.3
  Top Layer w0.254: R41.2@21.056,54.534 cw(c19.768,53.246) 21.59,53.246 ; R41.2@21.236,54.714 cw(c20.382,53.86) 21.59,53.86 ; R41.2@21.285,54.763 21.59,54.458 ; R41.2@21.377,54.506 cw(c21.445,54.313) 21.59,54.458 ; R41.2@21.416,54.894 cw(c20.995,54.473) 21.59,54.473 ; R41.2@21.542,54.671 ccw(c21.735,54.602) 21.59,54.458 ; U5.G1@21.834,52.422 ccw(c21.537,52.422) 21.747,52.632 ccw(c21.957,52.842) U5.G1@21.957,52.545 ; U5.G1@21.957,52.299 cw(c21.957,52.002) 22.167,52.212 cw(c22.377,52.422) U5.G1@22.08,52.422 ; U5.G2@22.541,51.715 ccw(c22.244,51.715) 22.454,51.925 ccw(c22.664,52.135) U5.G2@22.664,51.838 ; U5.G2@22.664,51.715 21.59,52.789 21.59,54.458
NetR55_2: R55.2 S3.3 S3.4 | length 4.2
  Top Layer w0.203: v1(76.695,57.163) 77.165,57.163 77.178,57.175 ; v1@76.783,57.075 cw(c76.993,56.865) 76.993,57.163 cw(c76.993,57.461) v1@76.783,57.25 ; S3.4@76.986,57.621 cw(c76.564,57.175) 77.178,57.175 ; S3.3@76.992,56.761 ccw(c76.622,57.175) 77.178,57.175 ; S3.3@77.178,56.553 77.178,57.175 ; S3.4@77.178,57.823 77.178,57.175 ; S3.3@77.363,56.761 cw(c77.734,57.175) 77.178,57.175 ; S3.4@77.369,57.621 ccw(c77.792,57.175) 77.178,57.175
NetR56_2: R56.2 S6.3 S6.4 | length 6.9
  Top Layer w0.254: S6.3@21.881,31.764 ccw(c21.449,32.196) 22.06,32.196 ccw(c22.671,32.196) S6.3@22.239,31.764 ; S6.4@21.881,32.676 cw(c21.449,32.244) 22.06,32.244 cw(c22.671,32.244) S6.4@22.239,32.676 ; S6.3@22.06,31.585 S6.4@22.06,32.855 R56.2@23.811,32.855 ; S6.4@22.494,32.676 cw(c22.926,32.244) 22.926,32.855 cw(c22.926,33.466) S6.4@22.494,33.034 ; R56.2@23.618,32.662 ccw(c23.152,32.196) 23.152,32.855 ccw(c23.152,33.514) R56.2@23.618,33.048
P_GOOD: L4.1 R32.2 U3.16 | length 10
  Top Layer w0.152: U3.16@42.271,30.475 44.412,30.475 44.912,30.475 45.085,30.302 45.085,29.019 45.312,28.792 L4.1@47.346,28.792 ; U3.16@43.016,30.405 cw(c43.184,30.236) 43.184,30.475 cw(c43.184,30.713) U3.16@43.016,30.545 ; R32.2@44.264,30.742 cw(c44.123,30.482) 44.419,30.482 ; R32.2@44.419,31.077 44.419,30.482 ; R32.2@44.574,30.742 ccw(c44.716,30.482) 44.419,30.482 ; L4.1@47.067,28.563 ccw(c46.514,28.011) 46.514,28.792 ccw(c46.514,29.574) L4.1@47.067,29.021 ; L4.1@47.174,28.671 ccw(c46.882,28.379) 46.882,28.792 ccw(c46.882,29.206) L4.1@47.174,28.914
PROG: JTAG1.14 R10.1 S1.2 U1.L9 U5.C1 | length 113.3
  Top Layer w0.089: S1.2@16.503,66.939 cw(c15.597,66.034) 16.878,66.034 cw(c18.159,66.034) S1.2@17.253,66.939 ; S1.2@16.566,67.002 cw(c15.812,66.248) 16.878,66.248 cw(c17.945,66.248) S1.2@17.191,67.002 ; S1.2@16.629,67.065 cw(c16.027,66.463) 16.878,66.463 cw(c17.73,66.463) S1.2@17.128,67.065 ; S1.2@16.692,67.128 cw(c16.241,66.677) 16.878,66.677 cw(c17.515,66.677) S1.2@17.065,67.128 ; S1.2@16.878,67.589 16.878,65.811 17.272,65.418 23.482,65.418 24.468,64.432 24.468,63.318 ; U5.C1@24.58,55.266 ccw(c24.196,55.295) 24.468,55.568 ; U5.C1@24.669,55.26 ccw(c24.451,55.276) 24.605,55.431 ccw(c24.76,55.585) U5.C1@24.776,55.367 ; U5.C1@24.77,55.456 cw(c24.741,55.84) 24.468,55.568 ; U5.C1@24.785,55.251 24.468,55.568 ; v1@32.168,63.195 ccw(c31.86,62.886) 31.86,63.322 ccw(c31.86,63.758) v1@32.168,63.45 ; v1@32.424,63.195 cw(c32.732,62.886) 32.732,63.322 cw(c32.732,63.758) v1@32.424,63.45 ; v1@43.116,61.773 ccw(c42.808,62.082) 43.243,62.082 ccw(c43.679,62.082) v1@43.371,61.773 ; v1(43.243,61.646) 43.243,62.382 42.304,63.322 v1(32.296,63.322) 24.473,63.322 24.468,63.318 ; U1.L9@58.273,52.752 v1(58.98,52.752) ; U1.L9@58.4,52.624 cw(c58.708,52.316) 58.708,52.752 cw(c58.708,53.188) U1.L9@58.4,52.879 ; v1@58.852,52.624 ccw(c58.544,52.316) 58.544,52.752 ccw(c58.544,53.188) v1@58.852,52.879 ; 24.468,55.568 24.468,63.318
  Bottom Layer w0.089: v1@32.424,63.195 cw(c32.732,62.886) 32.732,63.322 cw(c32.732,63.758) v1@32.424,63.45 ; v1@32.441,63.322 ccw(c32.441,63.547) R10.1@32.641,63.444 ; v1@32.442,63.322 cw(c32.442,63.097) R10.1@32.642,63.201 ; R10.1@32.563,63.16 ccw(c32.296,63.022) v1(32.296,63.322) ; R10.1@32.562,63.485 cw(c32.296,63.621) v1(32.296,63.322) ; R10.1@32.879,63.373 32.828,63.322 v1(32.296,63.322) ; v1@43.116,61.518 cw(c42.808,61.21) 43.243,61.21 cw(c43.679,61.21) v1@43.371,61.518 ; v1(43.243,61.646) 43.243,54.521 43.536,54.229 48.578,54.229 49.047,53.759 57.972,53.759 v1(58.98,52.752) 59.561,52.752 62.753,55.944 65.176,55.944 75.248,66.015 75.248,75.176 ; v1@58.799,52.752 ccw(c58.363,52.752) 58.671,53.06 ccw(c58.98,53.368) v1@58.98,52.932 ; v1@59.107,52.624 cw(c59.416,52.316) 59.416,52.752 cw(c59.416,53.188) v1@59.107,52.879 ; JTAG1.14@75.397,75.725 cw(c74.843,75.581) 75.248,75.176 ; JTAG1.14@75.483,75.747 cw(c75.017,75.626) 75.358,75.286 cw(c75.698,74.946) JTAG1.14@75.818,75.412 ; JTAG1.14@75.569,75.769 cw(c75.192,75.672) 75.467,75.396 cw(c75.743,75.121) JTAG1.14@75.84,75.498 ; JTAG1.14@75.796,75.326 ccw(c75.652,74.772) 75.248,75.176 ; JTAG1.14@75.935,75.864 75.248,75.176
PTA4: R40.2 U5.L7 | length 6.9
  Top Layer w0.152: v1(21.905,44.592) 22.664,45.351 U5.L7@23.371,45.351 ; v1@21.905,44.741 ccw(c21.905,45.1) 22.159,44.846 ccw(c22.413,44.592) v1@22.054,44.592 ; U5.L7@23.248,45.228 ccw(c22.951,44.932) 22.951,45.351 ccw(c22.951,45.771) U5.L7@23.248,45.474
  Bottom Layer w0.152: R40.2@20.701,43.421 20.733,43.421 v1(21.905,44.592) ; R40.2@20.701,43.592 ccw(c20.701,44.085) 21.049,43.737 ; R40.2@20.701,43.745 ccw(c20.701,44.606) 21.309,43.997 ; R40.2@21.024,43.421 cw(c21.727,43.421) 21.23,43.918 ; v1@21.756,44.592 cw(c21.397,44.592) 21.651,44.338 cw(c21.905,44.084) v1@21.905,44.444
PTA5: Shiel1.33 U5.M8 | length 28.2
  Top Layer w0.089: v1(22.441,40.03) 23.177,40.767 23.177,43.744 ; v1@22.441,40.211 ccw(c22.441,40.647) 22.749,40.339 ccw(c23.057,40.03) v1@22.621,40.03 ; 23.177,42.974 cw(c24.334,42.974) U5.M8@23.516,43.792 ; 23.177,43.189 cw(c24.119,43.189) U5.M8@23.453,43.855 ; 23.177,43.403 cw(c23.905,43.403) U5.M8@23.39,43.917 ; 23.177,43.618 cw(c23.69,43.618) U5.M8@23.328,43.98 ; U5.M8@23.191,43.838 cw(c23.122,43.8) 23.178,43.744 ; U5.M8@23.272,43.757 ccw(c23.233,43.688) 23.178,43.744 ; U5.M8@23.371,43.937 23.177,43.744
  Bottom Layer w0.089: v1@22.313,39.903 cw(c22.005,39.595) 22.441,39.595 cw(c22.877,39.595) v1@22.569,39.903 ; v1(22.441,40.03) 22.441,33.731 23.787,32.385 23.787,28.918 24.994,27.711 Shiel1.33@24.994,25.565 ; Shiel1.33@24.671,26.602 ccw(c23.894,27.38) 24.994,27.38 ccw(c26.093,27.38) Shiel1.33@25.316,26.602 ; Shiel1.33@24.734,26.539 ccw(c24.108,27.165) 24.994,27.165 ccw(c25.879,27.165) Shiel1.33@25.253,26.539 ; Shiel1.33@24.797,26.476 ccw(c24.323,26.951) 24.994,26.951 ccw(c25.664,26.951) Shiel1.33@25.19,26.476
PTA6: S6.1 U5.J7 | length 27.9
  Top Layer w0.089: S6.1@14.44,32.855 17.259,32.855 17.475,33.071 17.475,36.233 21.679,40.437 v1(21.679,41.434) ; S6.1@14.806,32.743 cw(c15.076,32.474) 15.076,32.855 cw(c15.076,33.236) S6.1@14.806,32.966 ; S6.1@14.869,32.68 cw(c15.29,32.259) 15.29,32.855 cw(c15.29,33.45) S6.1@14.869,33.029 ; S6.1@14.932,32.618 cw(c15.505,32.045) 15.505,32.855 cw(c15.505,33.665) S6.1@14.932,33.092 ; v1@21.551,41.306 cw(c21.243,40.998) 21.679,40.998 cw(c22.115,40.998) v1@21.807,41.306 ; U5.J7@24.64,46.62 cw(c24.289,46.269) 24.785,46.269 cw(c25.281,46.269) U5.J7@24.93,46.62 ; v1@24.657,46.186 ccw(c24.349,46.494) 24.785,46.494 ccw(c25.221,46.494) v1@24.913,46.186 ; v1@24.67,46.198 ccw(c24.529,46.369) 24.743,46.426 ; v1@24.695,46.215 ccw(c24.57,46.431) 24.811,46.366 ; U5.J7@24.703,46.683 cw(c24.503,46.484) 24.785,46.484 cw(c25.067,46.484) U5.J7@24.868,46.683 ; v1@24.727,46.129 ccw(c24.626,46.251) 24.779,46.292 ; 24.759,46.366 ccw(c25,46.431) v1@24.875,46.215 ; v1(24.785,46.058) U5.J7@24.785,46.765 ; 24.791,46.292 ccw(c24.944,46.251) v1@24.843,46.129 ; 24.827,46.426 ccw(c25.041,46.369) v1@24.9,46.198
  Bottom Layer w0.089: v1@21.551,41.561 ccw(c21.243,41.87) 21.679,41.87 ccw(c22.115,41.87) v1@21.807,41.561 ; v1(21.679,41.434) 21.679,42.253 24.785,45.359 v1(24.785,46.058) ; v1@24.657,45.931 cw(c24.349,45.623) 24.785,45.623 cw(c25.221,45.623) v1@24.913,45.931
PTA7: S6.2 U5.J8 | length 28.9
  Top Layer w0.089: S6.2@14.44,31.585 17.501,31.585 17.742,31.826 17.742,36.208 22.282,40.748 v1(22.282,41.434) ; S6.2@14.806,31.473 cw(c15.076,31.204) 15.076,31.585 cw(c15.076,31.966) S6.2@14.806,31.696 ; S6.2@14.869,31.41 cw(c15.29,30.989) 15.29,31.585 cw(c15.29,32.18) S6.2@14.869,31.759 ; S6.2@14.932,31.348 cw(c15.505,30.775) 15.505,31.585 cw(c15.505,32.395) S6.2@14.932,31.822 ; v1@22.154,41.306 cw(c21.846,40.998) 22.282,40.998 cw(c22.718,40.998) v1@22.41,41.306 ; U5.J8@25.347,45.913 cw(c24.996,45.562) 25.492,45.562 cw(c25.988,45.562) U5.J8@25.637,45.913 ; v1@25.364,45.479 ccw(c25.056,45.787) 25.492,45.787 ccw(c25.928,45.787) v1@25.62,45.479 ; v1@25.377,45.49 ccw(c25.236,45.662) 25.45,45.719 ; v1@25.402,45.508 ccw(c25.277,45.724) 25.518,45.659 ; U5.J8@25.41,45.976 cw(c25.211,45.777) 25.492,45.777 cw(c25.774,45.777) U5.J8@25.575,45.976 ; v1@25.434,45.422 ccw(c25.333,45.544) 25.486,45.585 ; 25.466,45.659 ccw(c25.707,45.724) v1@25.582,45.508 ; v1(25.492,45.351) U5.J8@25.492,46.058 ; 25.498,45.585 ccw(c25.652,45.544) v1@25.551,45.422 ; 25.534,45.719 ccw(c25.749,45.662) v1@25.607,45.49
  Bottom Layer w0.089: v1(22.282,41.434) 25.492,44.644 v1(25.492,45.351) ; v1@22.282,41.614 ccw(c22.282,42.05) 22.59,41.742 ccw(c22.899,41.434) v1@22.463,41.434 ; v1@25.364,45.224 cw(c25.056,44.915) 25.492,44.915 cw(c25.928,44.915) v1@25.62,45.224
PTA14: Shiel1.35 U5.L10 | length 28.1
  Top Layer w0.089: U5.L10@25.492,43.23 v1(26.199,43.23) ; U5.L10@25.575,43.147 cw(c25.774,42.948) 25.774,43.23 cw(c25.774,43.512) U5.L10@25.575,43.312 ; U5.L10@25.637,43.085 cw(c25.988,42.734) 25.988,43.23 cw(c25.988,43.726) U5.L10@25.637,43.375 ; 25.832,43.188 cw(c25.889,42.974) v1@26.06,43.115 ; 25.832,43.272 ccw(c25.889,43.486) v1@26.06,43.345 ; 25.891,43.204 ccw(c25.827,43.445) v1@26.043,43.32 ; 25.891,43.256 cw(c25.827,43.015) v1@26.043,43.14 ; 25.965,43.224 cw(c26.006,43.071) v1@26.129,43.172 ; 25.965,43.236 ccw(c26.006,43.389) v1@26.129,43.288 ; v1@26.072,43.102 ccw(c25.763,42.794) 25.763,43.23 ccw(c25.763,43.666) v1@26.072,43.358
  Bottom Layer w0.089: v1@26.199,43.049 cw(c26.199,42.614) 26.507,42.922 cw(c26.816,43.23) v1@26.38,43.23 ; v1(26.199,43.23) 27.635,41.794 27.635,33.96 26.2,32.525 26.2,29.388 27.534,28.054 Shiel1.35@27.534,25.565 ; Shiel1.35@27.211,26.602 ccw(c26.434,27.38) 27.534,27.38 ccw(c28.633,27.38) Shiel1.35@27.856,26.602 ; Shiel1.35@27.274,26.539 ccw(c26.648,27.165) 27.534,27.165 ccw(c28.419,27.165) Shiel1.35@27.793,26.539 ; Shiel1.35@27.337,26.476 ccw(c26.863,26.951) 27.534,26.951 ccw(c28.204,26.951) Shiel1.35@27.73,26.476
PTA15: Shiel1.36 U5.L11 | length 20.1
  Top Layer w0.089: U5.L11@26.199,42.523 26.908,42.523 v1(28.067,41.364) ; U5.L11@26.282,42.44 cw(c26.481,42.241) 26.481,42.523 cw(c26.481,42.804) U5.L11@26.282,42.605 ; U5.L11@26.345,42.378 cw(c26.695,42.027) 26.695,42.523 cw(c26.695,43.019) U5.L11@26.345,42.668 ; v1@27.886,41.364 ccw(c27.451,41.364) 27.759,41.672 ccw(c28.067,41.98) v1@28.067,41.544
  Bottom Layer w0.089: Shiel1.36@27.211,31.682 ccw(c26.434,32.46) 27.534,32.46 ccw(c28.633,32.46) Shiel1.36@27.856,31.682 ; Shiel1.36@27.274,31.619 ccw(c26.648,32.245) 27.534,32.245 ccw(c28.419,32.245) Shiel1.36@27.793,31.619 ; Shiel1.36@27.337,31.556 ccw(c26.863,32.031) 27.534,32.031 ccw(c28.204,32.031) Shiel1.36@27.73,31.556 ; Shiel1.36@27.534,30.645 27.534,32.88 28.067,33.414 v1(28.067,41.364) ; v1@27.939,41.236 cw(c27.631,40.928) 28.067,40.928 cw(c28.503,40.928) v1@28.195,41.236
PTA16: Shiel1.39 U5.K10 | length 34.9
  Top Layer w0.089: U5.K10@26.199,43.937 v1(26.906,43.937) ; U5.K10@26.282,43.855 cw(c26.481,43.655) 26.481,43.937 cw(c26.481,44.219) U5.K10@26.282,44.02 ; U5.K10@26.345,43.792 cw(c26.695,43.441) 26.695,43.937 cw(c26.695,44.433) U5.K10@26.345,44.082 ; 26.539,43.895 cw(c26.596,43.681) v1@26.767,43.822 ; 26.539,43.979 ccw(c26.596,44.193) v1@26.767,44.052 ; 26.598,43.911 ccw(c26.534,44.152) v1@26.75,44.027 ; 26.598,43.963 cw(c26.534,43.722) v1@26.75,43.847 ; 26.672,43.931 cw(c26.713,43.778) v1@26.836,43.879 ; 26.672,43.943 ccw(c26.713,44.096) v1@26.836,43.995 ; v1@26.779,43.809 ccw(c26.47,43.501) 26.47,43.937 ccw(c26.47,44.373) v1@26.779,44.065
  Bottom Layer w0.089: v1@26.906,43.757 cw(c26.906,43.321) 27.215,43.629 cw(c27.523,43.937) v1@27.087,43.937 ; v1(26.906,43.937) 29.667,41.176 29.667,34.696 31.318,33.045 31.318,28.067 32.614,26.772 Shiel1.39@32.614,25.565 ; 31.488,27.897 cw(c29.872,26.28) Shiel1.39@32.158,26.28 ; 31.64,27.745 cw(c30.175,26.28) Shiel1.39@32.247,26.28 ; 31.792,27.593 cw(c30.479,26.28) Shiel1.39@32.336,26.28 ; 31.944,27.441 cw(c30.782,26.28) Shiel1.39@32.425,26.28 ; 32.095,27.29 cw(c31.086,26.28) Shiel1.39@32.514,26.28 ; 32.247,27.138 cw(c31.389,26.28) Shiel1.39@32.603,26.28 ; 32.399,26.986 cw(c31.693,26.28) Shiel1.39@32.691,26.28 ; 32.551,26.834 cw(c31.996,26.28) Shiel1.39@32.78,26.28
PTA17: Shiel1.38 U5.K11 | length 21.1
  Top Layer w0.089: U5.K11@26.906,43.23 27.623,43.23 28.994,41.859 v1(28.994,41.161) ; U5.K11@26.989,43.147 cw(c27.188,42.948) 27.188,43.23 cw(c27.188,43.512) U5.K11@26.989,43.312 ; U5.K11@27.052,43.085 cw(c27.403,42.734) 27.403,43.23 cw(c27.403,43.726) U5.K11@27.052,43.375 ; v1@28.866,41.288 ccw(c28.558,41.597) 28.994,41.597 ccw(c29.43,41.597) v1@29.122,41.288
  Bottom Layer w0.089: v1@28.866,41.033 cw(c28.558,40.725) 28.994,40.725 cw(c29.43,40.725) v1@29.122,41.033 ; v1(28.994,41.161) 28.994,33.96 30.074,32.88 Shiel1.38@30.074,30.645 ; Shiel1.38@29.751,31.682 ccw(c28.974,32.46) 30.074,32.46 ccw(c31.173,32.46) Shiel1.38@30.396,31.682 ; Shiel1.38@29.814,31.619 ccw(c29.188,32.245) 30.074,32.245 ccw(c30.959,32.245) Shiel1.38@30.333,31.619 ; Shiel1.38@29.877,31.556 ccw(c29.403,32.031) 30.074,32.031 ccw(c30.744,32.031) Shiel1.38@30.27,31.556